# EAGLE board power_shield (EAGLE 7.7.0)
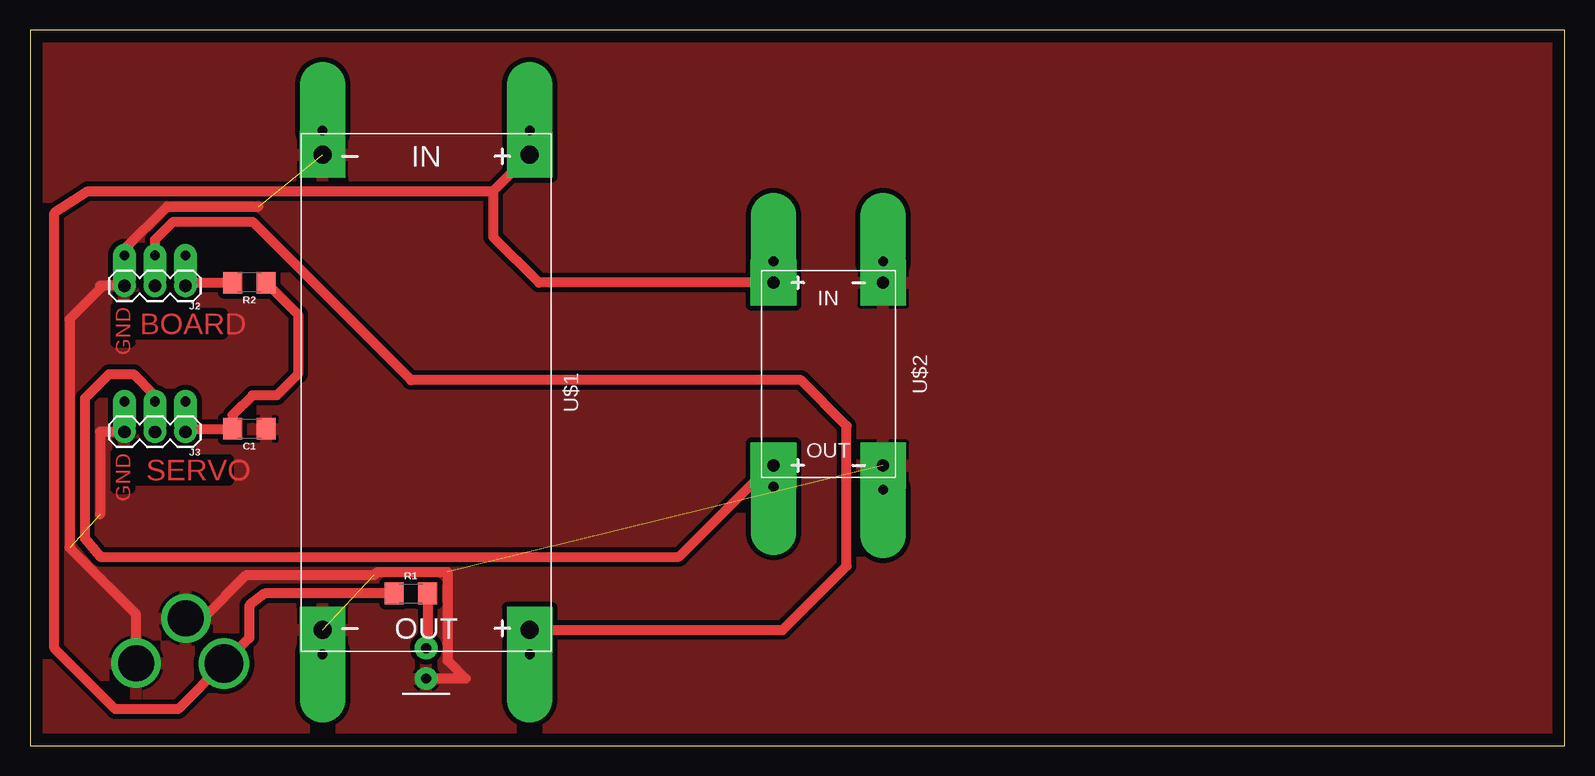
[diagram p0: board, top side]
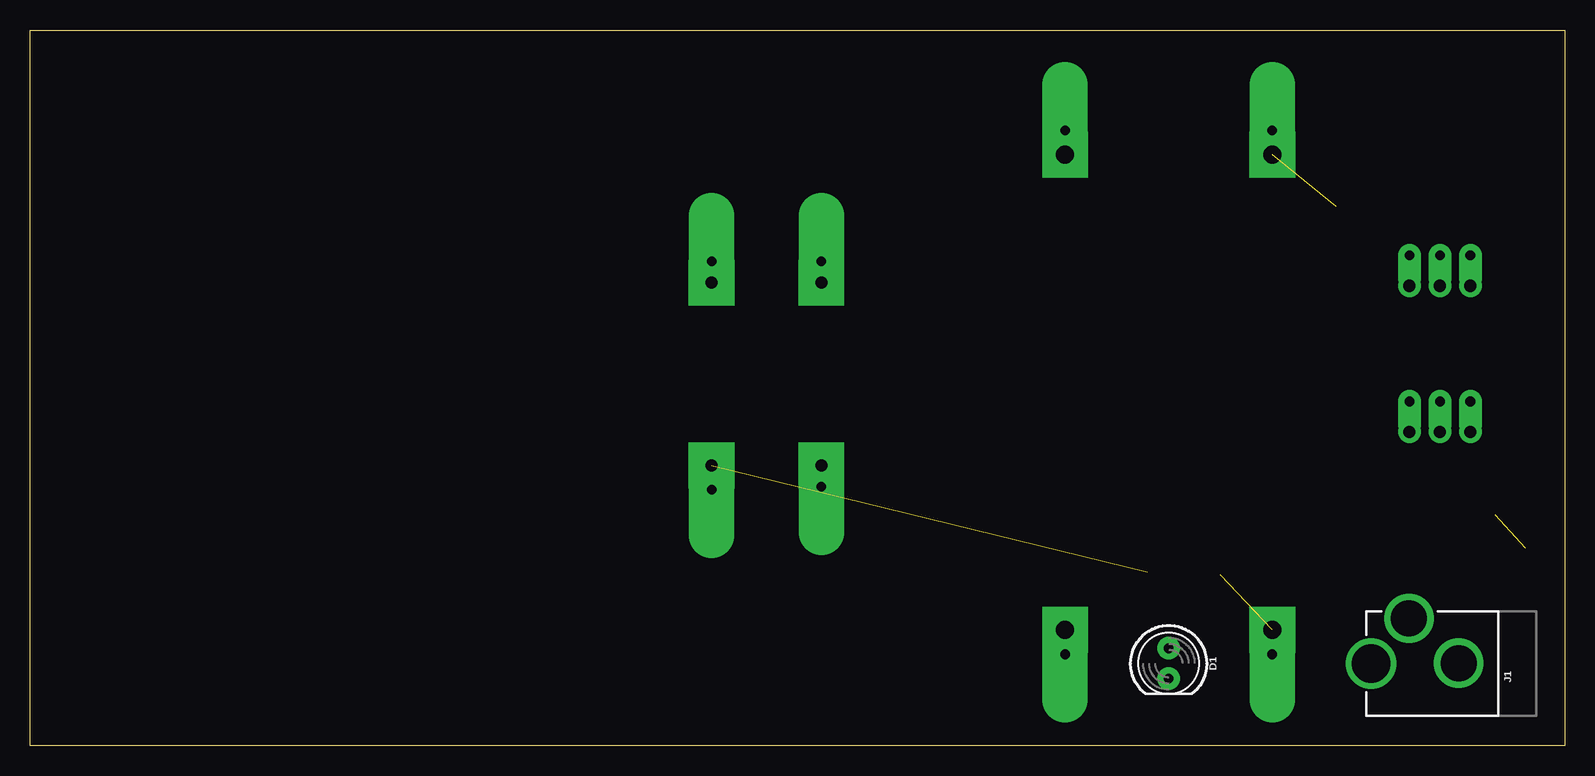
[diagram p1: board, bottom side, seen from below]

Size 127.94 x 59.68 mm. Coordinates in mm from the lower left corner, seen from the top.
Outline: 0,0 127.94,0 127.94,59.68 0,59.68 0,0
Copper layers (1*16): Top 0.035mm / dielectric 1.5mm / Bottom 0.035mm
Design rules "default *": minimum track width 10mil, minimum drill 24mil, track to track 6mil, track to pad 6mil, pad to pad 6mil, via to via 6mil, smd to smd 6mil, copper to edge 40mil, drill to drill 8mil, minimum pad ring 10mil, minimum via ring 8mil, stop-mask expansion 4mil, vias tented up to drill 0mil, thermal gap 10mil

## Footprints (pad centres in the part's own frame; a part is rotated, then mirrored left to right if it is on the bottom)
1206 = smd 1.6 x 1.8: 1 -1.4,0; 2 1.4,0
LED_5MM = drill 0.813 pad 1.88: A -1.27,0; K 1.27,0
POWER_JACK_PTH_LOCK = drill 2.997 pad 4.115: GND 0.025,6.557; GNDBREAK 3.762,10.7 | drill 3.2 pad 4.115: PWR 0,13.878
1X03 = drill 1.016 pad 1.88: 1 0,0; 2 2.54,0; 3 5.08,0 | drill 0.8 pad 1.93 offset: P$1 0,-2.54; P$2 2.54,-2.54; P$3 5.08,-2.54
DC-DC-STEP-DOWN-LM2596 = drill 1.5 pad 3.81 square: IN+ -19.812,8.636; IN- -19.812,-8.636; OUT+ 19.812,8.636; OUT- 19.812,-8.636 | drill 0.8 pad 3.81 offset: P$1 21.844,8.636; P$2 21.844,-8.636; P$3 -21.844,-8.636; P$4 -21.844,8.636
DC-DC-STEP-DOWN-MP2307 = drill 1 pad 3.81 square: IN+ -7.62,-4.572; IN- -7.62,4.572; OUT+ 7.62,-4.572; OUT- 7.62,4.572 | drill 0.8 pad 3.81 offset: P$1 -9.398,4.572; P$2 -9.398,-4.572; P$3 9.652,4.572; P$4 9.398,-4.572

## Placement (x,y rotation side)
C1  10nF  [1206]  18.29,26.42 180 top
D1  [LED_5MM]  33.02,6.86 270 bottom
J1  POWER_JACKPTH_LOCK  [POWER_JACK_PTH_LOCK]  2.29,6.86 90 bottom
J2  [1X03]  12.95,38.35 180 top
J3  [1X03]  12.95,26.16 180 top
R1  1k  [1206]  31.75,12.7 0 top
R2  480  [1206]  18.29,38.61 180 top
U$1  DC-DC-STEP-DOWN-LM2596  [DC-DC-STEP-DOWN-LM2596]  33.02,29.46 270 top
U$2  DC-DC-STEP-DOWN-MP2307  [DC-DC-STEP-DOWN-MP2307]  66.55,30.99 270 top

## Library data of the parts
C1 = SparkFun-Capacitors; PROD_ID: CAP-09822
D1 = SparkFun-LED
J1 = SparkFun-Connectors; PROD_ID: CONN-08197; SF_ID: PRT-00119
J2 J3 = SparkFun-Connectors
R1 R2 = SparkFun-Resistors; PROD_ID: RES-08705
U$1 U$2 = diy-modules_modified

## Nets
5V: J3.2 U$2.OUT+
12V: J1.PWR R1.1 U$1.IN+ U$2.IN+
GND: C1.1 D1.K J1.GND J1.GNDBREAK J2.3 J3.3 U$1.IN- U$1.OUT- U$2.IN- U$2.OUT-
N$1: D1.A R1.2
N$2: C1.2 J3.1 R2.1
N$4: J2.1 R2.2
VCC: J2.2 U$1.OUT+

## Tracks (layer width: path | path; a pad name or v marks a point on that pad's centre or on a via)
5V
  Top 0.813: U$2.OUT+ 61.72,23.37 54.1,15.75 5.84,15.75 4.57,17.27 4.57,28.96 6.6,30.99 8.64,30.99 10.41,29.21 J3.2
12V
  Top 0.813: U$2.IN+ 42.42,38.61 38.61,42.42 38.61,46.23 | R1.1 19.56,12.7 18.29,11.68 18.29,8.98 J1.PWR 12.35,3.05 7.11,3.05 2.03,8.13 2.03,44.45 4.83,46.23 38.61,46.23 | 38.61,46.23 U$1.IN+
GND  (4 unrouted)
  Top 0.813: J3.3 5.84,26.16 5.84,19.3 | 6.1,38.35 J2.3 7.87,41.4 11.43,44.96 19.05,44.96 | 6.1,38.35 5.84,38.35 | D1.K 36.32,5.59 34.8,7.11 34.8,14.48 28.96,14.48 28.7,14.22 18.03,14.22 14.43,10.62 J1.GNDBREAK | J1.GND 8.84,10.97 3.3,16.51 3.3,35.56 6.1,38.35
  pour Top (isolate 0.406): 0,59.44 128.02,59.44 128.02,0 0,0
N$1
  Top 0.813: R1.2 33.15,9.53 D1.A
N$2
  Top 0.813: J3.1 13.21,26.42 C1.2 16.89,27.56 18.54,29.21 20.57,29.21 22.35,30.99 22.35,35.94 R2.1
N$4
  Top 0.813: J2.1 13.21,38.61 R2.2
VCC
  Top 0.813: U$1.OUT+ 62.74,9.65 68.07,14.99 68.07,26.67 64.26,30.48 31.75,30.48 18.54,43.69 11.94,43.69 10.41,42.16 J2.2

## Text on the board
Top: GND | BOARD | GND | SERVO